# EAGLE board l (EAGLE 9.7.0)

Size 148.02 x 85.59 mm. Coordinates in mm from the lower left corner, seen from the top.
Outline: 0,0 148.02,0 148.02,85.59 0,85.59 0,0
Copper layers (1*16): Top 0.035mm / dielectric 1.5mm / Bottom 0.035mm
Design rules "default": minimum track width 6mil, minimum drill 0.35mm, track to track 6mil, track to pad 6mil, pad to pad 6mil, via to via 6mil, smd to smd 6mil, copper to edge 40mil, drill to drill 6mil, minimum pad ring 10mil, minimum via ring 8mil, stop-mask expansion 4mil, vias tented up to drill 0mil, thermal gap 10mil

## Footprints (pad centres in the part's own frame; a part is rotated, then mirrored left to right if it is on the bottom)
LEDRD254W60D565H860B = drill 0.981 pad 1.581: 1 -1.27,0; 2 1.27,0
LEDRD254W60D565H860B_G = drill 0.981 pad 1.581: 1 -1.27,0; 2 1.27,0
LEDRD254W60D565H860B_Y = drill 0.981 pad 1.581: 1 -1.27,0; 2 1.27,0
HC-SR04 = drill 1.016 long: 1 -3.81,0; 2 -1.27,0; 3 1.27,0; 4 3.81,0
RESAD1016W63L850D250B = drill 0.83 pad 1.43: 1 -5.08,0; 2 5.08,0
SWITCH-MOMENTARY-PTH-6.5MM = drill 1.016 pad 1.88: 1 -3.251,2.261; 2 3.251,2.261; 3 -3.251,-2.261; 4 3.251,-2.261
ARDUINO-UNO-R3-SHIELD = drill 1.016 pad 1.88: 3.3V 24.13,-2.54; 5V 24.13,0; A0 24.13,12.7; A1 24.13,15.24; A2 24.13,17.78; A3 24.13,20.32; A4 24.13,22.86; A5 24.13,25.4; AREF -24.13,-13.97; D2 -24.13,20.32; D3 -24.13,17.78; D4 -24.13,15.24; D5 -24.13,12.7; D6 -24.13,10.16; D7 -24.13,7.62; D8 -24.13,3.81; D9 -24.13,1.27; D10 -24.13,-1.27; D11 -24.13,-3.81; D12 -24.13,-6.35; D13 -24.13,-8.89; GND@0 24.13,2.54; GND@1 24.13,5.08; GND@2 -24.13,-11.43; IOREF 24.13,-7.62; NC 24.13,-10.16; RES 24.13,-5.08; RX -24.13,25.4; SCL -24.13,-19.05; SDA -24.13,-16.51; TX -24.13,22.86; VIN 24.13,7.62

## Placement (x,y rotation side)
D1  RED  [LEDRD254W60D565H860B]  108.94,31.5 180 top
D2  GREEN  [LEDRD254W60D565H860B_G]  141.96,31.5 180 top
D3  YELLOW  [LEDRD254W60D565H860B_Y]  126.72,31.5 180 top
DIST1  DISTANCE-SENSOR-4PINHC-SR04  [HC-SR04]  7.62,51.52 90 top
R1  10k  [RESAD1016W63L850D250B]  115.29,13.72 0 top
RGREENRES1  220  [RESAD1016W63L850D250B]  138.15,28.96 180 top
RRED  220  [RESAD1016W63L850D250B]  105.13,28.96 0 top
RYELLOWRES  220  [RESAD1016W63L850D250B]  122.91,28.96 0 top
SBUTTON  SWITCH_MOMENTARY  [SWITCH-MOMENTARY-PTH-6.5MM]  107.67,7.37 90 top
U1  ARDUINO-UNO-R3-SHIELD  [ARDUINO-UNO-R3-SHIELD]  57.19,37.7 180 top

## Library data of the parts
D1 = Tinkercad; CATEGORY: Opto-Electronic; SUB-CATEGORY: LED; VALUE: LED_RED
D2 = Tinkercad; CATEGORY: Opto-Electronic; SUB-CATEGORY: LED; VALUE: LED_GREEN
D3 = Tinkercad; CATEGORY: Opto-Electronic; SUB-CATEGORY: LED; VALUE: LED_YELLOW
DIST1 R1 RGREENRES1 RRED RYELLOWRES SBUTTON U1 = Tinkercad

## Nets
D1_A: D1.1 RRED.2
D2_A: D2.1 RGREENRES1.1
D3_A: D3.1 RYELLOWRES.2
SBUTTON_3: R1.1 SBUTTON.3 SBUTTON.4
U1_5V: DIST1.1 U1.5V
U1_D2: SBUTTON.1 SBUTTON.2 U1.D2
U1_D6: DIST1.2 U1.D6
U1_D7: DIST1.3 U1.D7
U1_D9: RRED.1 U1.D9
U1_D10: RYELLOWRES.1 U1.D10
U1_D11: RGREENRES1.2 U1.D11
U1_GND: D1.2 D2.2 D3.2 DIST1.4 R1.2 U1.GND@0 U1.GND@1 U1.GND@2

## Tracks (layer width: path | path; a pad name or v marks a point on that pad's centre or on a via)
D1_A  (1 unrouted)
D2_A  (1 unrouted)
D3_A  (1 unrouted)
SBUTTON_3  (2 unrouted)
U1_5V  (1 unrouted)
U1_D2  (2 unrouted)
U1_D6  (1 unrouted)
U1_D7  (1 unrouted)
U1_D9  (1 unrouted)
U1_D10  (1 unrouted)
U1_D11  (1 unrouted)
U1_GND  (7 unrouted)